# Altium PCB Power Selection.PcbDoc (part 1 of 2)
Units mm, origin at the board's own origin, x right, y up, seen from the top; angles counter-clockwise.
Board outline 152.4 x 101.6 mm, 4 copper layers (Top Layer, Ground, Signal, Bottom Layer), stack 0.777 mm thick; 134 components, 65 nets, 477 pads, 42 vias.
Unrouted connection lines stored in the file: 244.
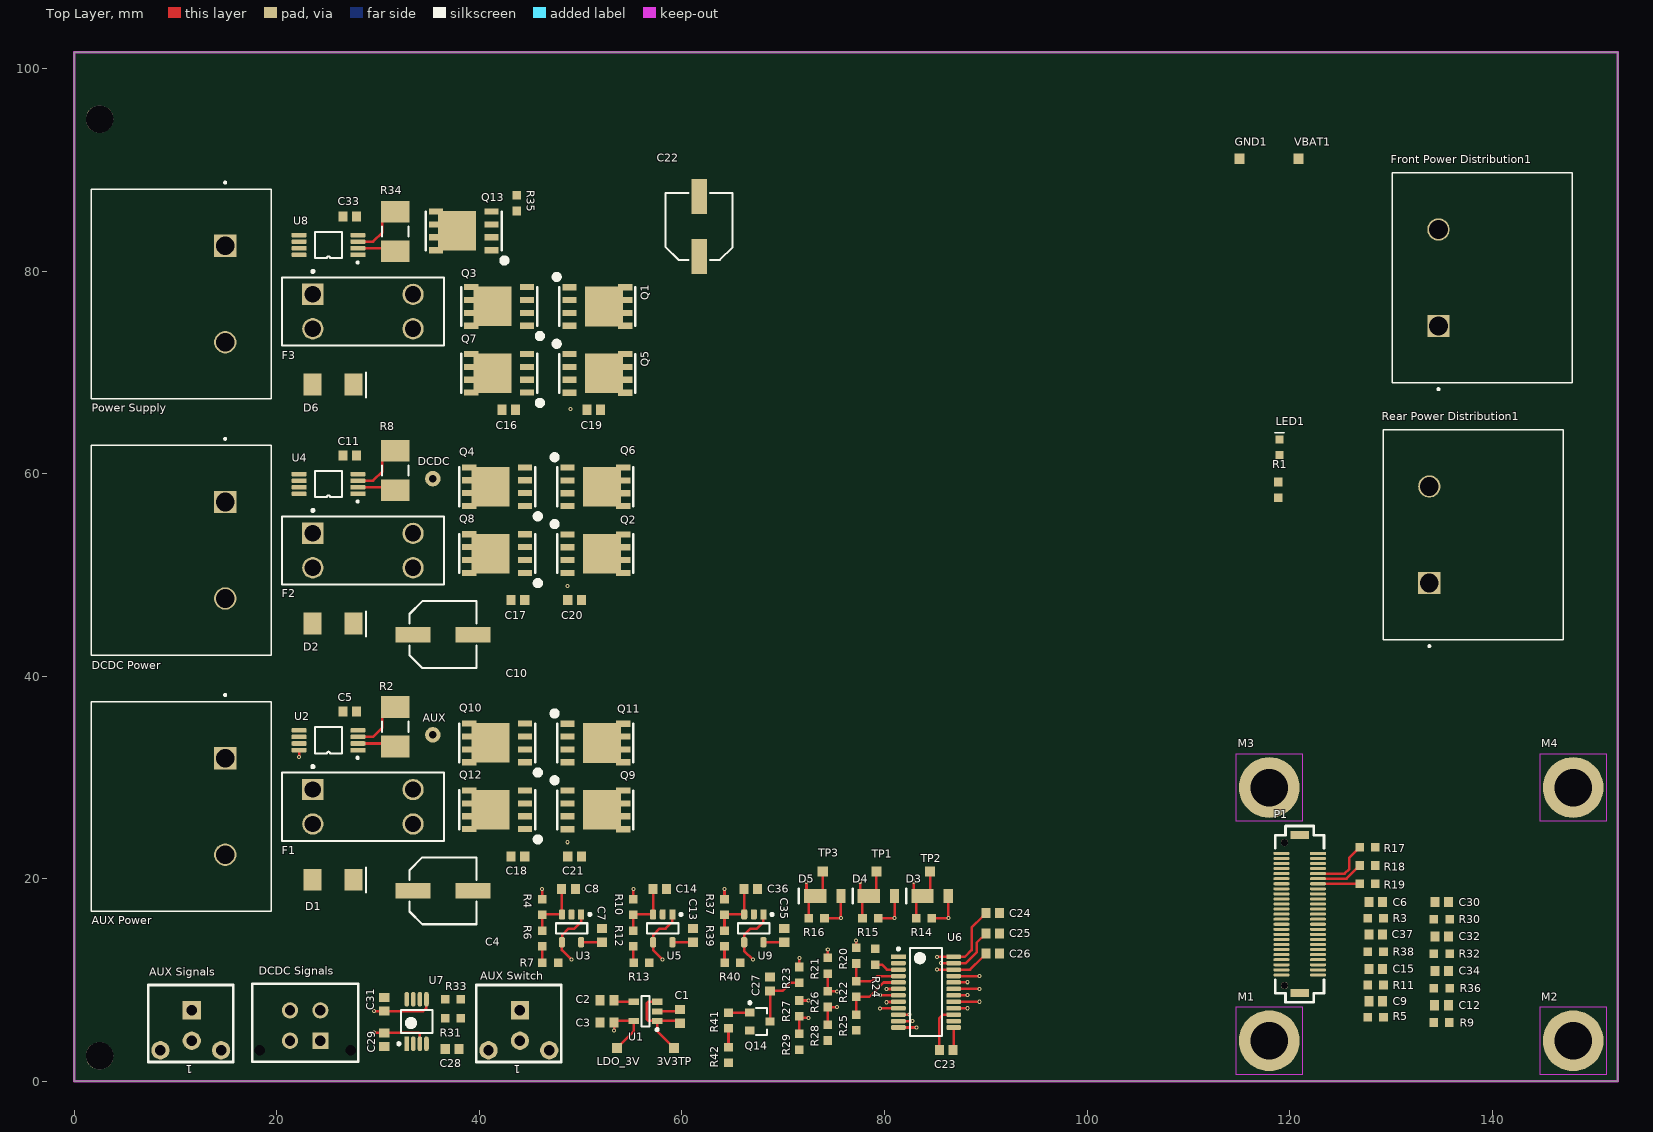
[diagram p0: Top Layer view]
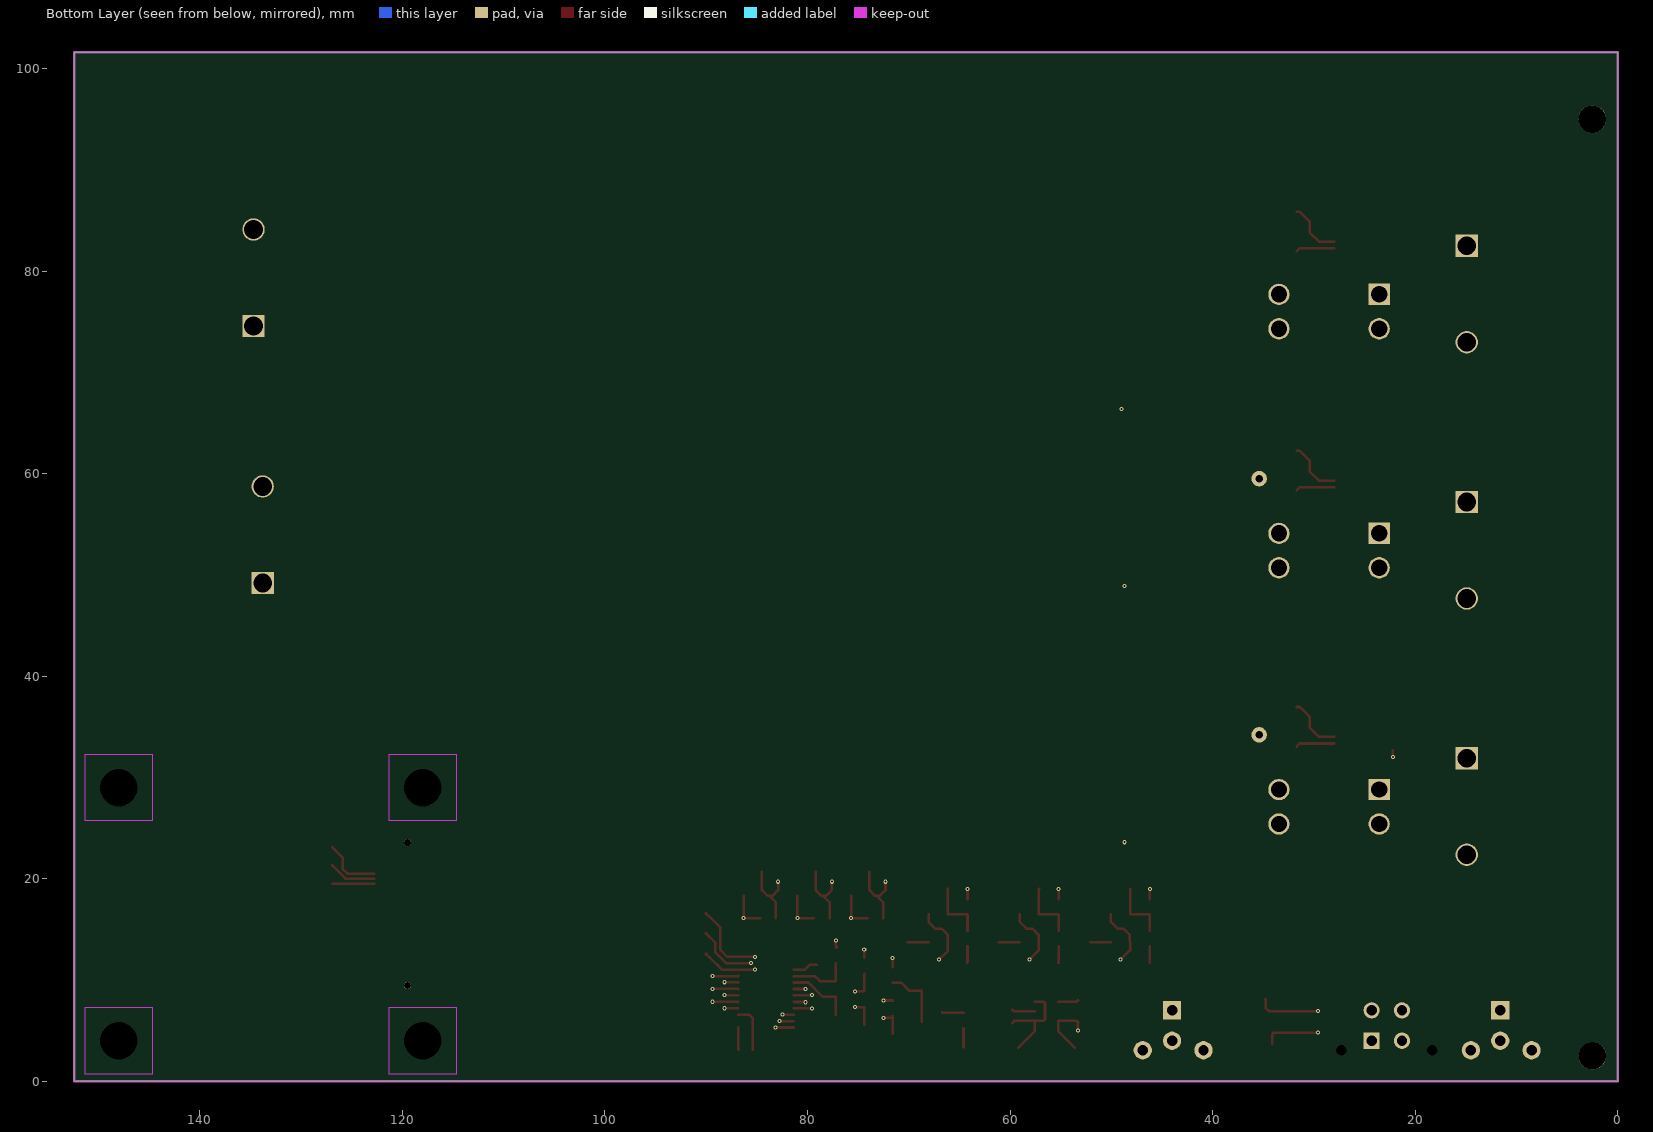
[diagram p1: Bottom Layer view, seen from below]
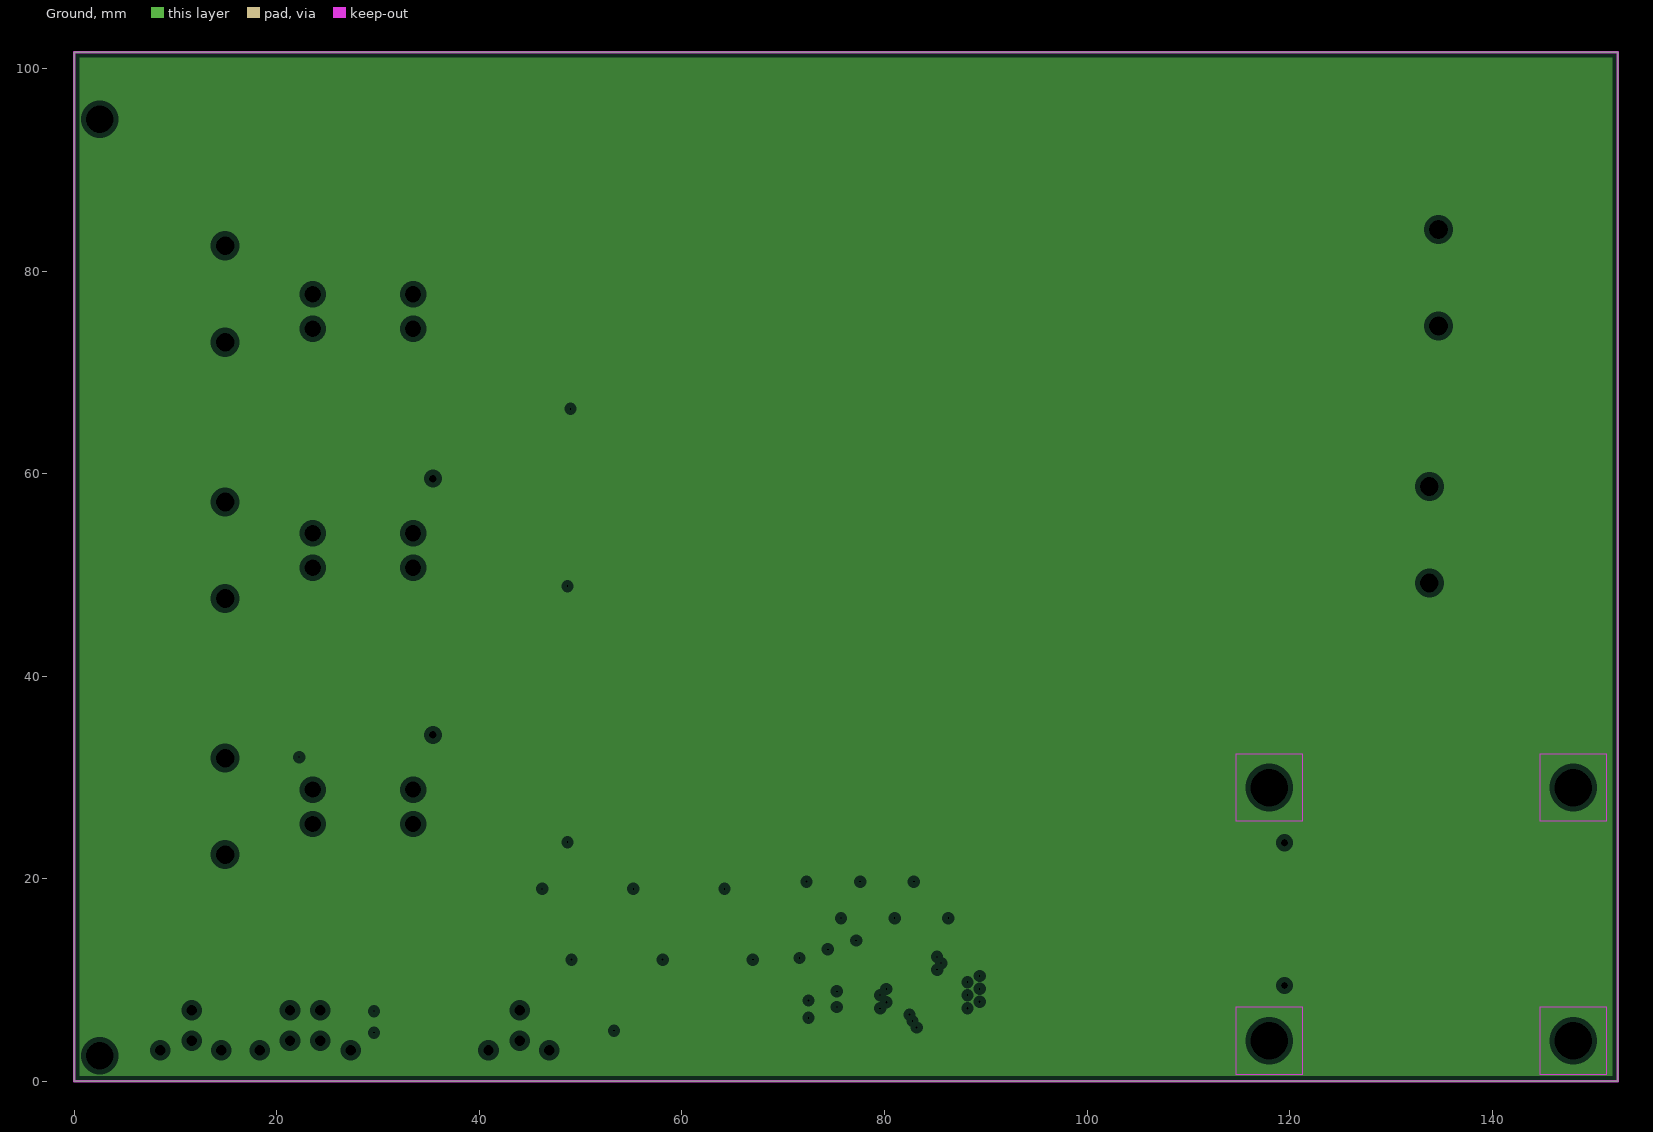
[diagram p2: Ground, clearances drawn from the general rule]
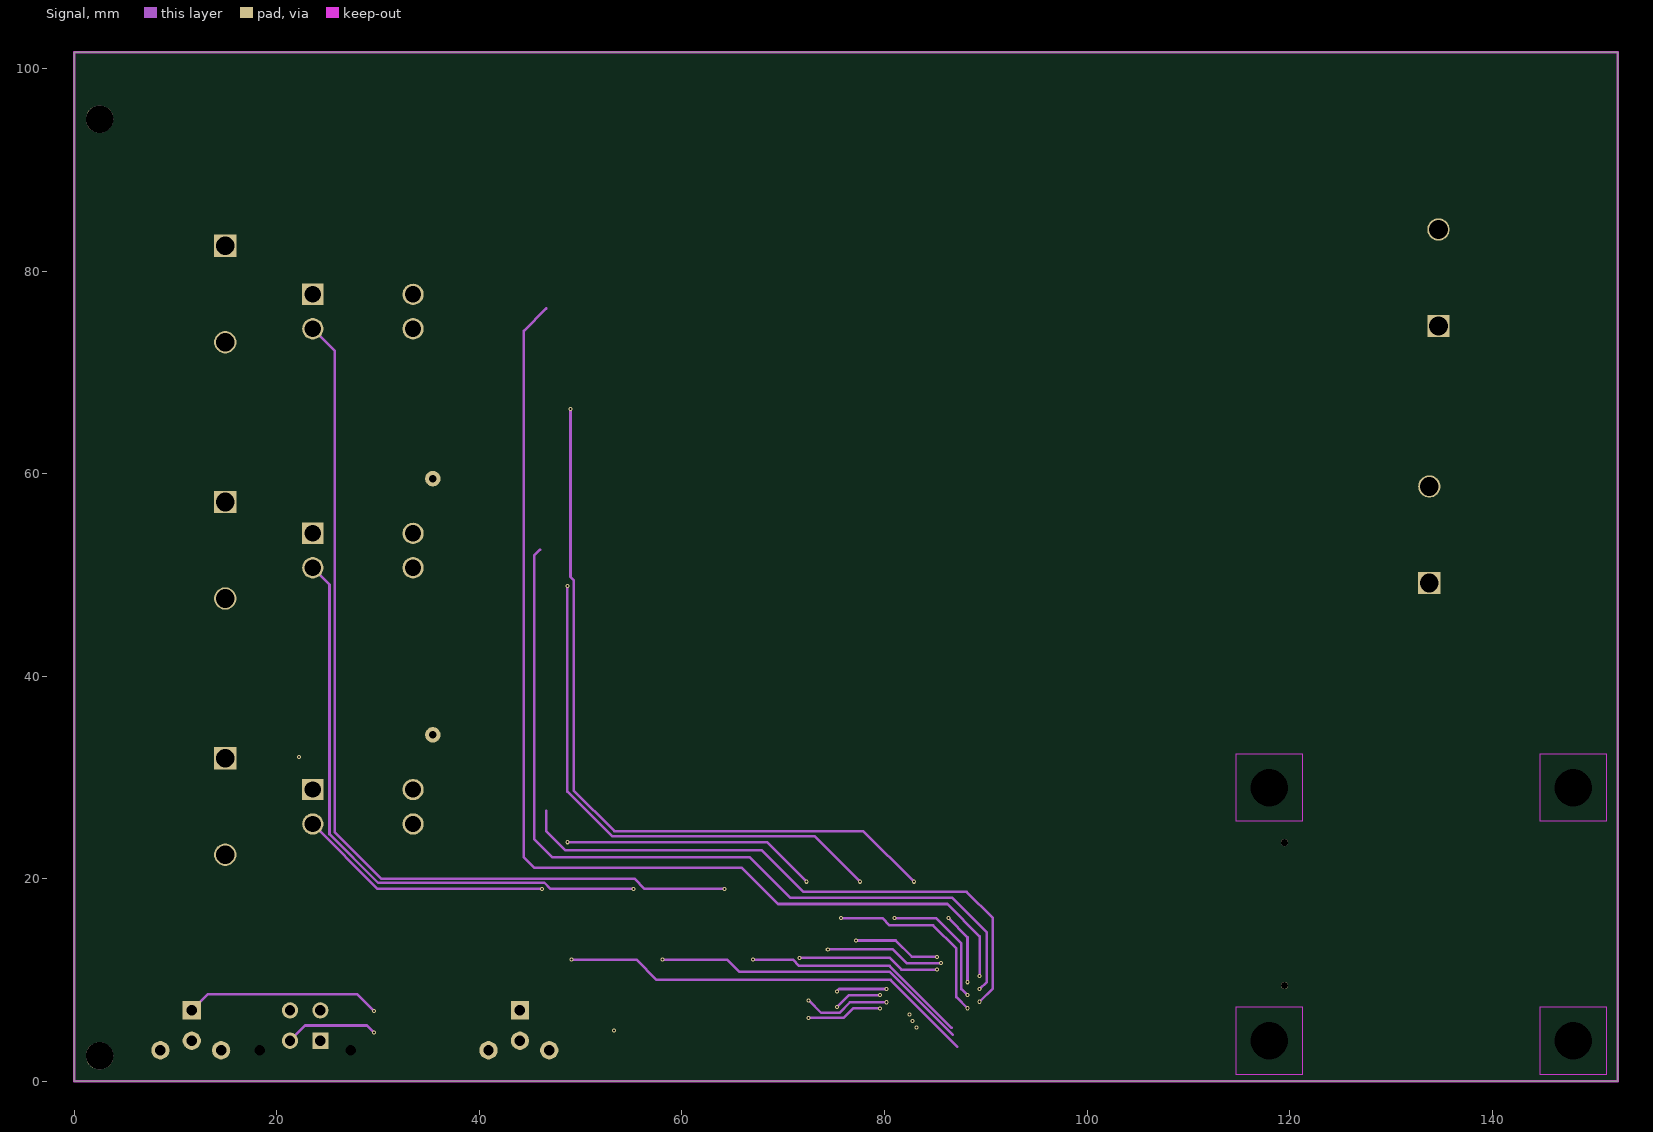
[diagram p3: Signal]

## Layer stack, top to bottom
Top Solder: solder mask 0.01, SM-001, Dk 4
Top Layer: signal copper 0.035
Dielectric 1: prepreg 0.254, PP-017, Dk 4.3
Ground: plane copper 0.036
Dielectric 3: core 0.127, Core-039, Dk 4.8
Signal: signal copper 0.036
Dielectric 5: prepreg 0.254, PP-017, Dk 4.3
Bottom Layer: signal copper 0.035
Bottom Solder: solder mask 0.01, SM-001, Dk 4

## Board outline
0,0 152.4,0 152.4,101.6 0,101.6

## Design rules (kind name [scope] priority, off if disabled: settings)
Clearance [All] p1: gap=0.254 ignorepadtopadclearanceinfootprint=FALSE except(0: Arc-Text Arc-Hole Track-Text Track-Hole SMDPad-Text SMDPad-Hole THPad-Text THPad-Hole Via-Text Via-Hole Fill-Text Fill-Hole Poly-Text Poly-Hole Region-Text Region-Hole Text-Text Text-Hole; 0.152: Arc-Arc Arc-Track Arc-SMDPad Track-Track Track-SMDPad SMDPad-SMDPad)
PlaneClearance [All] p1: clearance=0.508
PlaneConnect "Schematic Power Plane Connect Style" [InNetClass('HighCurrent')] p1: planeconnectstyle=Direct reliefexpansion=0.508 reliefentries=4 reliefconductorwidth=0.254 reliefairgap=0.254
PlaneConnect [All] p2: planeconnectstyle=Relief reliefexpansion=0.508 reliefentries=4 reliefconductorwidth=0.254 reliefairgap=0.254
PolygonConnect "Schematic Polygon Connect Style" [InNetClass('HighCurrent')] p1: connectstyle=Direct reliefconductorwidth=0.254 reliefentries=4 polygonreliefangle="45 Angle" airgapwidth=0.254
PolygonConnect [All] p2: connectstyle=Relief reliefconductorwidth=0.254 reliefentries=4 polygonreliefangle="90 Angle" airgapwidth=0.254
RoutingVias [All] p1: holewidth=0.2 width=0.4 viastyle="Through Hole" minholewidth=0.2 minwidth=0.4 maxholewidth=0.2 maxwidth=0.4
SolderMaskExpansion [All] p1: expansion=0.102 istentingtop=FALSE
Width [All] p1: maxlimit=0.254 minlimit=0.254 preferedwidth=0.254
28 further rules are at their usual default settings.

## Classes and differential pairs
net class HighCurrent: AUX_BAT_IN DCDC_FUSED DCDC_UNFUSED NetC4_1 NetC10_1 NetF3_3 "Power Supply_UNFUSED" VBAT VS_1 VS_2 VS_3
component class "Power Selection - Temperature Sense": C28 C29 C30 C31 C32 R30 R31 R32 R33 U7
component class "Power Selection - Power Supply": C33 C34 C35 C36 C37 D6 F3 "Power Supply" Q13 R34 R35 R36 R37 R38 R39 R40 U8 U9
component class "Power Selection - Power Path": C16 C17 C18 C19 C20 C21 C22 C23 C24 C25 C26 C27 D3 D4 D5 Q1 Q2 Q3 Q4 Q5 Q6 Q7 Q8 Q9 Q10 Q11 Q12 Q14 R14 R15 R16 R17 R18 R19 R20 R21 R22 R23 R24 R25 R26 R27 R28 R29 TP1 TP2 TP3 U6
component class "Power Selection - DC-DC": C10 C11 C12 C13 C14 C15 D2 DCDC "DCDC Power" "DCDC Signals" F2 R8 R9 R10 R11 R12 R13 U4 U5
component class "Power Selection - AUX": AUX "AUX Power" "AUX Signals" "AUX Switch" C4 C5 C6 C7 C8 C9 D1 F1 R2 R3 R4 R5 R6 R7 R41 R42 U2 U3
component class Controller_Board_Interface: 3V3TP C1 C2 C3 "Front Power Distribution1" GND1 LDO_3V LED1 M1 M2 M3 M4 P1 R1 "Rear Power Distribution1" U1 VBAT1

## Components (designator, comment, footprint, x,y, rotation, side; value= is the part's Value field where it differs from the comment)
3V3TP "Test Point" "Test Point"#1 59.2,1.8 r90 top
AUX "Thru Test Point" "Thru Test Point"#1 35.4,34.2 r90 top
"AUX Power" "CONN BARRIER STRIP 2CIRC 0.375\"" 6PCV-02-006 14.9,31.9 r270 top
"AUX Signals" "CONN 2POS MICRO-FIT 3mm" "CONN, 2POS MICRO-FIT" 11.5,7 r180 top
"AUX Switch" "CONN 2POS MICRO-FIT 3mm" "CONN, 2POS MICRO-FIT" 43.9,7 r180 top
C1 "CAP CER 1UF 50V 10% X7R 0603" "CAP, 0603" 59.8,6.4 r90 top
C2 "CAP CER 10nF 50V 5% X7R 0603" "CAP, 0603" 52.6,8 r180 top
C3 "CAP CER 1UF 50V 10% X7R 0603" "CAP, 0603" 52.6,5.8 r180 top
C4 "47UF" "CAP ALUM 6.3MM RADIAL SMD" 36.4,18.8 r0 top
C5 "CAP CER 0.1UF 50V 10% X7R 0603" "CAP, 0603" 27.2,36.5 r0 top
C6 "CAP CER 10nF 50V 5% X7R 0603" "CAP, 0603" 128.5,17.7 r0 top
C7 "CAP CER 0.1UF 50V 10% X7R 0603" "CAP, 0603" 52.1,14.4 r90 top
C8 "CAP CER 10nF 50V 5% X7R 0603" "CAP, 0603" 48.8,19 r0 top
C9 "CAP CER 10nF 50V 5% X7R 0603" "CAP, 0603" 128.5,7.9 r0 top
C10 "47UF" "CAP ALUM 6.3MM RADIAL SMD" 36.4,44.1 r0 top
C11 "CAP CER 0.1UF 50V 10% X7R 0603" "CAP, 0603" 27.2,61.8 r0 top
C12 "CAP CER 10nF 50V 5% X7R 0603" "CAP, 0603" 135,7.5 r0 top
C13 "CAP CER 0.1UF 50V 10% X7R 0603" "CAP, 0603" 61.1,14.4 r90 top
C14 "CAP CER 10nF 50V 5% X7R 0603" "CAP, 0603" 57.8,19 r0 top
C15 "CAP CER 10nF 50V 5% X7R 0603" "CAP, 0603" 128.5,11.1 r0 top
C16 "CAP CER 20PF 50V ±5% C0G/NP0 0603" "CAP, 0603" 42.9,66.3 r180 top value=20pF
C17 "CAP CER 20PF 50V ±5% C0G/NP0 0603" "CAP, 0603" 43.8,47.5 r180 top value=20pF
C18 "CAP CER 20PF 50V ±5% C0G/NP0 0603" "CAP, 0603" 43.8,22.2 r180 top value=20pF
C19 "CAP CER 2PF 50V C0G 0603" "CAP, 0603" 51.3,66.3 r180 top
C20 "CAP CER 2PF 50V C0G 0603" "CAP, 0603" 49.4,47.5 r0 top
C21 "CAP CER 2PF 50V C0G 0603" "CAP, 0603" 49.4,22.2 r0 top
C22 "CAP ALUM 100UF 20% 35V SMD" "CAP ALUM 6.3MM RADIAL SMD" 61.7,84.4 r90 top value=100µF
C23 "CAP CER 0.1UF 50V 10% X7R 0603" "CAP, 0603" 86.1,3.1 r0 top
C24 "CAP CER 0.1UF 50V 10% X7R 0603" "CAP, 0603" 90.7,16.6 r0 top
C25 "CAP CER 0.1UF 50V 10% X7R 0603" "CAP, 0603" 90.7,14.6 r0 top
C26 "CAP CER 0.1UF 50V 10% X7R 0603" "CAP, 0603" 90.7,12.6 r0 top
C27 "CAP CER 10nF 50V 5% X7R 0603" "CAP, 0603" 68.7,9.6 r90 top
C28 "CAP CER 0.1UF 50V 10% X7R 0603" "CAP, 0603" 37.3,3.2 r180 top
C29 "CAP CER 10nF 50V 5% X7R 0603" "CAP, 0603" 30.6,4.1 r270 top
C30 "CAP CER 10nF 50V 5% X7R 0603" "CAP, 0603" 135.025,17.7 r0 top
C31 "CAP CER 10nF 50V 5% X7R 0603" "CAP, 0603" 30.6,7.6 r90 top
C32 "CAP CER 10nF 50V 5% X7R 0603" "CAP, 0603" 135.025,14.3 r0 top
C33 "CAP CER 0.1UF 50V 10% X7R 0603" "CAP, 0603" 27.2,85.4 r0 top
C34 "CAP CER 10nF 50V 5% X7R 0603" "CAP, 0603" 135.025,10.9 r0 top
C35 "CAP CER 0.1UF 50V 10% X7R 0603" "CAP, 0603" 70.1,14.4 r90 top
C36 "CAP CER 10nF 50V 5% X7R 0603" "CAP, 0603" 66.8,19 r0 top
C37 "CAP CER 10nF 50V 5% X7R 0603" "CAP, 0603" 128.5,14.5 r0 top
D1 "DIODE TVS 15VWM 24.4VC DO-214AA (SMB)" "DO-214AA Diode" 23.5,19.9 r0 top
D2 "DIODE TVS 15VWM 24.4VC DO-214AA (SMB)" "DO-214AA Diode" 23.5,45.2 r0 top
D3 "DIODE SCHOTTKY 30V 1A POWERDI123" "DIODE SCHOTTKY 30V 1A POWERDI123" 86.3,18.3 r180 top
D4 "DIODE SCHOTTKY 30V 1A POWERDI123" "DIODE SCHOTTKY 30V 1A POWERDI123" 81,18.3 r180 top
D5 "DIODE SCHOTTKY 30V 1A POWERDI123" "DIODE SCHOTTKY 30V 1A POWERDI123" 75.7,18.3 r180 top
D6 "DIODE TVS 15VWM 24.4VC DO-214AA (SMB)" "DO-214AA Diode" 23.5,68.8 r0 top
DCDC "Thru Test Point" "Thru Test Point"#2 36.8,59.5 r90 top
"DCDC Power" "CONN BARRIER STRIP 2CIRC 0.375\"" 6PCV-02-006 14.9,57.2 r270 top
"DCDC Signals" "CONN 4POS MICRO-FIT 3mm" "CONN 4POS MICROFIT (2x2)" 21.3,7 r180 top
F1 "3568" KSTN-3568_V 28.5,27.1 r0 top
F2 "3568" KSTN-3568_V 28.5,52.4 r0 top
F3 "3568" KSTN-3568_V 28.5,76 r0 top
"Front Power Distribution1" "CONN BARRIER STRIP 2CIRC 0.375\"" 6PCV-02-006 134.7,74.57 r90 top
GND1 "Test Point" "Test Point"#2 115.054,91.087 r90 top
LDO_3V "Test Point" "Test Point"#3 53.6,3.1 r90 top
LED1 "LED GREEN CLEAR 2V 0603" LED_0603 119,61.9 r90 top
M1 "STANDOFF RND M2.5X0.45 STEEL 5MM" "M2.5 Standoff" 118,4 r0 top locked
M2 "STANDOFF RND M2.5X0.45 STEEL 5MM" "M2.5 Standoff" 148,4 r0 top locked
M3 "STANDOFF RND M2.5X0.45 STEEL 5MM" "M2.5 Standoff" 118,29 r0 top locked
M4 "STANDOFF RND M2.5X0.45 STEEL 5MM" "M2.5 Standoff" 148,29 r0 top locked
P1 "CONN 50POS Bergstak Plug 0.02\"" "CONN, Bergstak 50 Pos Plug" 121,16.5 r0 top locked
"Power Supply" "CONN BARRIER STRIP 2CIRC 0.375\"" 6PCV-02-006 14.9,82.5 r270 top
Q1 "MOSFET P-CH PWR56 40V 4.9 MOHM" "PMOS PWR56 40V 4.9 MOHM" 48.9,78.4 r0 top
Q2 "MOSFET P-CH PWR56 40V 4.9 MOHM" "PMOS PWR56 40V 4.9 MOHM" 48.7,54 r0 top
Q3 "MOSFET P-CH PWR56 40V 4.9 MOHM" "PMOS PWR56 40V 4.9 MOHM" 44.7,74.6 r180 top
Q4 "MOSFET P-CH PWR56 40V 4.9 MOHM" "PMOS PWR56 40V 4.9 MOHM" 44.5,56.8 r180 top
Q5 "MOSFET P-CH PWR56 40V 4.9 MOHM" "PMOS PWR56 40V 4.9 MOHM" 48.9,71.8 r0 top
Q6 "MOSFET P-CH PWR56 40V 4.9 MOHM" "PMOS PWR56 40V 4.9 MOHM" 48.7,60.6 r0 top
Q7 "MOSFET P-CH PWR56 40V 4.9 MOHM" "PMOS PWR56 40V 4.9 MOHM" 44.7,68 r180 top
Q8 "MOSFET P-CH PWR56 40V 4.9 MOHM" "PMOS PWR56 40V 4.9 MOHM" 44.5,50.2 r180 top
Q9 "MOSFET P-CH PWR56 40V 4.9 MOHM" "PMOS PWR56 40V 4.9 MOHM" 48.7,28.7 r0 top
Q10 "MOSFET P-CH PWR56 40V 4.9 MOHM" "PMOS PWR56 40V 4.9 MOHM" 44.5,31.5 r180 top
Q11 "MOSFET P-CH PWR56 40V 4.9 MOHM" "PMOS PWR56 40V 4.9 MOHM" 48.7,35.3 r0 top
Q12 "MOSFET P-CH PWR56 40V 4.9 MOHM" "PMOS PWR56 40V 4.9 MOHM" 44.5,24.9 r180 top
Q13 "MOSFET P-CH PWR56 40V 4.9 MOHM" "PMOS PWR56 40V 4.9 MOHM" 41.2,82.06 r180 top
Q14 "MOSFET N-CH 30V 6.2A 0.9W SOT-23" "MOSFET N-CH 30V 6.2A 0.9W SOT-23" 67.7,5.9 r0 top
R1 "RES 4.7K OHM 1% 1/10W 0603" "RES, 0603" 118.9,58.4 r90 top
R2 "RES 0.003 OHM 1% 1.5W 2010" "RES 2010" 31.7,35 r90 top
R3 "RES 100 OHM 1% 1/10W 0603" "RES, 0603" 128.5,16.1 r180 top
R4 "RES 470K OHM 1% 1/4W 0603" "RES, 0603" 46.2,17.2 r270 top
R5 "RES 100 OHM 1% 1/10W 0603" "RES, 0603" 128.5,6.3 r180 top
R6 "RES 100K OHM 5% 1/8W 0603" "RES, 0603" 46.2,14.1 r270 top
R7 "RES 10K OHM 1% 1/10W 0603" "RES, 0603" 47,11.7 r0 top
R8 "RES 4m OHM 1% 2W 2010" "RES 2010" 31.7,60.3 r90 top
R9 "RES 100 OHM 1% 1/10W 0603" "RES, 0603" 135,5.8 r180 top
R10 "RES 470K OHM 1% 1/4W 0603" "RES, 0603" 55.2,17.2 r270 top
R11 "RES 100 OHM 1% 1/10W 0603" "RES, 0603" 128.5,9.5 r180 top
R12 "RES 100K OHM 5% 1/8W 0603" "RES, 0603" 55.2,14.1 r270 top
R13 "RES 10K OHM 1% 1/10W 0603" "RES, 0603" 56,11.7 r0 top
R14 "2.21K" "RES, 0603" 83.9,16.1 r0 top
R15 "2.21K" "RES, 0603" 78.6,16.1 r0 top
R16 "2.21K" "RES, 0603" 73.3,16.1 r0 top
R17 "RES 10K OHM 1% 1/10W 0603" "RES, 0603" 127.7,23.1 r180 top
R18 "RES 10K OHM 1% 1/10W 0603" "RES, 0603" 127.7,21.3 r180 top
R19 "RES 10K OHM 1% 1/10W 0603" "RES, 0603" 127.7,19.5 r180 top
R20 "RES 1M OHM 1% 1/10W 0603" "RES, 0603" 77.2,12.402 r270 top
R21 "RES 1M OHM 1% 1/10W 0603" "RES, 0603" 74.4,11.4 r270 top
R22 "RES 19.6K OHM 1% 1/10W 0603" "RES, 0603" 77.2,9.102 r270 top
R23 "RES 1M OHM 1% 1/10W 0603" "RES, 0603" 71.6,10.5 r270 top
R24 "RES 255K OHM 1% 1/10W 0603" "RES, 0603" 79.1,12.292 r90 top
R25 "RES SMD 75K OHM 0.1% 1/10W 0603" "RES, 0603" 77.2,5.802 r90 top value=75KR
R26 "RES 29.4K OHM 1% 1/10W 0603" "RES, 0603" 74.4,8.1 r270 top
R27 "RES SMD 44.2K OHM 1% 1/10W 0603" "RES, 0603" 71.6,7.2 r270 top
R28 "RES 76.8K OHM 1% 1/10W 0603" "RES, 0603" 74.4,4.8 r270 top
R29 "RES SMD 75K OHM 0.1% 1/10W 0603" "RES, 0603" 71.6,3.9 r270 top value=75KR
R30 "RES 10K OHM 1% 1/10W 0603" "RES, 0603" 135.025,16 r180 top
R31 "RES 10K OHM 1% 1/10W 0603" "RES, 0603" 37.4,6.2 r0 top
R32 "RES 10K OHM 1% 1/10W 0603" "RES, 0603" 135.025,12.6 r180 top
R33 "RES 10K OHM 1% 1/10W 0603" "RES, 0603" 37.4,8.1 r0 top
R34 "RES 4m OHM 1% 2W 2010" "RES 2010" 31.7,83.9 r90 top
R35 "RES 10K OHM 1% 1/10W 0603" "RES, 0603" 43.7,86.7 r90 top
R36 "RES 100 OHM 1% 1/10W 0603" "RES, 0603" 135.025,9.2 r180 top
R37 "RES 470K OHM 1% 1/4W 0603" "RES, 0603" 64.2,17.2 r270 top
R38 "RES 100 OHM 1% 1/10W 0603" "RES, 0603" 128.5,12.8 r180 top
R39 "RES 100K OHM 5% 1/8W 0603" "RES, 0603" 64.2,14.1 r270 top
R40 "RES 10K OHM 1% 1/10W 0603" "RES, 0603" 65,11.7 r0 top
R41 "RES SMD 1K OHM 0.1% 1/10W 0603" "RES, 0603" 64.6,6 r90 top value=10k
R42 "RES 1M OHM 1% 1/10W 0603" "RES, 0603" 64.6,2.6 r270 top
"Rear Power Distribution1" "CONN BARRIER STRIP 2CIRC 0.375\"" 6PCV-02-006 133.8,49.2 r90 top
TP1 "Test Point" "Test Point"#4 79.2,20.8 r90 top
TP2 "Test Point" "Test Point"#2 84.5,20.7 r90 top
TP3 "Test Point" "Test Point"#5 73.9,20.9 r90 top
U1 "IC REG LINEAR 3V 200MA SOT23-5" SOT95P280X145-5N 56.4,6.902 r180 top
U2 "50V/V" "IC CURRENT AMPLIFIER INA240 TSSOP-8" 28,32.7 r180 top
U3 "IC OP AMP GEN PURPOSE RR 10MHZ SOT-23-5" "IC OP AMP GP RR 10MHZ SOT-23-5" 49.1,15.1 r270 top
U4 "100V/V" "IC CURRENT AMPLIFIER INA240 TSSOP-8" 28,58 r180 top
U5 "IC OP AMP GEN PURPOSE RR 10MHZ SOT-23-5" "IC OP AMP GP RR 10MHZ SOT-23-5" 58.1,15.1 r270 top
U6 "IC OR CONTROLLER SOURCE SELECT 24SSOP" "IC OR CTRLR SRC SELECT 24SSOP" 84.1,8.8 r0 top
U7 "IC OP AMP DUAL GP RR 10MHZ 8-VSSOP" "IC DUAL OPAMP OPA2197 8-VSSOP" 33.8,5.9 r90 top
U8 "100V/V" "IC CURRENT AMPLIFIER INA240 TSSOP-8" 28,81.6 r180 top
U9 "IC OP AMP GEN PURPOSE RR 10MHZ SOT-23-5" "IC OP AMP GP RR 10MHZ SOT-23-5" 67.1,15.1 r270 top
VBAT1 "Test Point" "Test Point"#2 120.896,91.087 r90 top

## Footprints (in the part's own frame and the unit in brackets; to place one, negate y for a bottom-side part, rotate by r counter-clockwise, add the part's x,y. Pads: shape width x height; smd on the part's side, far side on the other; paste and mask are expansions set on the pad)
6PCV-02-006 [mm]
  rect 2.204x2.204 hole 1.854: 1(0,0)
  round 2.204 hole 1.854: 2(9.53,0)
  silkscreen extent -6.34,-13.21 15.12,4.57
"CAP ALUM 6.3MM RADIAL SMD" [mm] "Aluminum Electrolytic Capacitor, Body 6.50x6.50x5.50mm, IPC Low Density"
  rect 3.45x1.55 smd: 1(-2.95,0) 2(2.95,0)
  silkscreen extent -3.3,-3.3 3.3,3.3, body extent -3.9,-3.3 3.9,3.3, height 5.5
"CAP, 0603" [mm] "Chip Capacitor, 2-Leads, Body 1.60x0.81mm, IPC Medium Density"
  rect 0.9x1 smd mask+0.076: 1(-0.675,0) 2(0.675,0)
  body extent -0.87,-0.48 0.87,0.48, height 0.9
"CONN 4POS MICROFIT (2x2)" [mm]
  round 1.6 hole 1.02: 1(0,0) 2(-3,0) 3(0,3)
  rect 1.6x1.6 hole 1.02: 4(-3,3)
  round 0 hole 1.02: ""(-6,3.94) ""(3,3.94)
  silkscreen extent -6.75,-2.63 3.75,5.06, body extent -6.57,-2.47 3.57,6.29, height 9.91
"CONN, 2POS MICRO-FIT" [mm]
  round 1.8 hole 1.02: 0(-3,3.94) 0(3,3.94) 2(-0.1,3)
  rect 1.8x1.8 hole 1.02: 1(-0.1,0)
  silkscreen extent -4.2,-2.5 4.2,5.1, body extent -3.67,-2.47 3.48,6.3, height 9.95
"CONN, Bergstak 50 Pos Plug" [mm] "Bergstak 50 Position Plug"
  rect 1.6x0.3 smd: 1(1.8,6)
  oval 1.6x0.3 smd: 2(1.8,5.5) 3(1.8,5) 4(1.8,4.5) 5(1.8,4) 6(1.8,3.5) 7(1.8,3) 8(1.8,2.5) 9(1.8,2) 10(1.8,1.5) 11(1.8,1) 12(1.8,0.5) 13(1.8,0) 14(1.8,-0.5) 15(1.8,-1) 16(1.8,-1.5) 17(1.8,-2) 18(1.8,-2.5) 19(1.8,-3) 20(1.8,-3.5) 21(1.8,-4) 22(1.8,-4.5) 23(1.8,-5) 24(1.8,-5.5) 25(1.8,-6) 26(-1.8,-6) 27(-1.8,-5.5) 28(-1.8,-5) 29(-1.8,-4.5) 30(-1.8,-4) 31(-1.8,-3.5) 32(-1.8,-3) 33(-1.8,-2.5) 34(-1.8,-2) 35(-1.8,-1.5) 36(-1.8,-1) 37(-1.8,-0.5) 38(-1.8,0) 39(-1.8,0.5) 40(-1.8,1) 41(-1.8,1.5) 42(-1.8,2) 43(-1.8,2.5) 44(-1.8,3) 45(-1.8,3.5) 46(-1.8,4) 47(-1.8,4.5) 48(-1.8,5) 49(-1.8,5.5) 50(-1.8,6)
  round 0.7 hole 0.7: ""(-1.5,-7.05) ""(-1.5,7.05)
  rect 1.8x0.8 smd: ""(0,-7.8) ""(0,7.8)
  silkscreen extent -2.4,-8.7 2.4,8.7, body extent -2.3,-7.75 2.3,7.75, height 4.2
"DIODE SCHOTTKY 30V 1A POWERDI123" [mm] "Diodes Incorporated DFLS130L-7"
  rect 0.9x1.4 smd: 1(0,0)
  rect 2.2x1.4 smd: 2(2.55,0)
  silkscreen extent 4.15,-0.7 4.15,0.7, body extent -0.27,-0.88 3.42,0.9, height 0.98
"DO-214AA Diode" [mil] "Zener Diode 16V 5W SMBJ5353B-TP"
  rect 70x85 smd: 1(0,0) 2(160,0)
  silkscreen extent 209,-50 209,47, body extent -21,-60 187,55, height 95
"IC CURRENT AMPLIFIER INA240 TSSOP-8" [mm]
  rect 1.5x0.45 smd: 1(0,0)
  rrect50% 1.5x0.45 smd: 2(0,-0.65) 3(0,-1.3) 4(0,-1.95) 5(5.8,-1.95) 6(5.8,-1.3) 7(5.8,-0.65) 8(5.8,0)
  silkscreen extent -0.06,-2.28 4.22,0.84, body extent -0.28,-2.52 6.22,0.58, height 1.2
"IC DUAL OPAMP OPA2197 8-VSSOP" [mm] "TSOP, 8-Leads, Body 3.00x3.00mm, Pitch 0.65mm, IPC Medium Density"
  rect 1.45x0.45 smd: 1(-2.2,0.975)
  oval 1.45x0.45 smd: 2(-2.2,0.325) 3(-2.2,-0.325) 4(-2.2,-0.975) 5(2.2,-0.975) 6(2.2,-0.325) 7(2.2,0.325) 8(2.2,0.975)
  silkscreen extent -2.32,-1.55 1.15,1.87, body extent -2.45,-1.55 2.45,1.55, height 1.1
"IC OP AMP GP RR 10MHZ SOT-23-5" [mm] "SOT23, 5-Leads, Body 2.90x2.80mm, Pitch 0.95mm, IPC Medium Density"
  rect 1x0.6 smd: 1(-1.375,0.95)
  rrect50% 1x0.6 smd: 2(-1.375,0) 3(-1.375,-0.95) 4(1.375,-0.95) 5(1.375,0.95)
  silkscreen extent -1.5,-1.55 0.5,1.93, body extent -1.5,-1.53 1.5,1.53, height 1.45
"IC OR CTRLR SRC SELECT 24SSOP" [mm] "LTC4417"
  rect 1.45x0.45 smd: 1(-2.725,3.492)
  rrect50% 1.45x0.45 smd: 2(-2.725,2.857) 3(-2.725,2.222) 4(-2.725,1.587) 5(-2.725,0.953) 6(-2.725,0.318) 7(-2.725,-0.318) 8(-2.725,-0.953) 9(-2.725,-1.587) 10(-2.725,-2.222) 11(-2.725,-2.857) 12(-2.725,-3.492) 13(2.725,-3.492) 14(2.725,-2.857) 15(2.725,-2.222) 16(2.725,-1.587) 17(2.725,-0.953) 18(2.725,-0.318) 19(2.725,0.318) 20(2.725,0.953) 21(2.725,1.587) 22(2.725,2.222) 23(2.725,2.857) 24(2.725,3.492)
  silkscreen extent -2.85,-4.35 1.6,4.39, body extent -3,-4.35 3,4.35, height 1.75
KSTN-3568_V [mm] "THD, 4-Leads, Body 16x6.73mm, Pitch 9.9mm"
  rect 2.1x2.1 hole 1.6: 1(-4.95,1.7)
  round 2.1 hole 1.6: 2(-4.95,-1.7) 3(4.95,1.7) 4(4.95,-1.7)
  silkscreen extent -8,-3.36 8,4.09, body extent -8,-3.37 8,3.37, height 7.44
LED_0603 [mm]
  rect 0.8x0.8 smd: 1(-0.05,0.01) 2(1.45,0.01)
  silkscreen extent 2.13,-0.46 2.13,0.45, body extent -0.09,-0.39 1.51,0.41, height 0.8
"M2.5 Standoff" [mm]
  round 6 smd: ""(0,0)
  round 0 hole 3.7: ""(0,0)
  Keep-Out Layer region: -3.3,-3.3 3.3,-3.3 3.3,3.3 -3.3,3.3
"MOSFET N-CH 30V 6.2A 0.9W SOT-23" [mm] "SOT23, 3-Leads, Body 2.90x2.40mm, Pitch 0.90mm, IPC Medium Density"
  rect 0.9x0.8 smd: 1(-1,0.9) 2(-1,-0.9) 3(1,0)
  silkscreen extent -1.12,-1.35 0.7,1.97, body extent -1.25,-1.5 1.25,1.5, height 1.1
"PMOS PWR56 40V 4.9 MOHM" [mm] "Mosfet Array 2 P-Channel (Dual) 30V 60A 46W Surface Mount PowerPAK?SO-8 Dual"
  rect 1.42x0.61 smd: 1(0,0) 2(0,-1.27) 3(0,-2.54) 4(0,-3.81) 5(5.49,-3.81) 6(5.49,-2.54) 7(5.49,-1.27) 8(5.49,0)
  rect 3.75x3.91 smd: 8(3.405,-1.905)
  silkscreen extent -1.52,-3.81 6.51,1.27, body extent -0.69,-4.32 6.17,0.51, height 1.2
"RES 2010" [mm] "Chip Resistor, 2-Leads, Body 5.08x2.54mm, IPC Medium Density"
  rect 2.15x2.8 smd: 1(-1.95,0) 2(1.95,0)
  silkscreen extent -0.5,-1.3 0.5,1.3, body extent -2.67,-1.4 2.67,1.4, height 1.04
"RES, 0603" [mm] "Chip Resistor, 2-Leads, Body 1.60x0.80mm, IPC Medium Density"
  rect 0.85x0.85 smd: 1(-0.775,0) 2(0.775,0)
  body extent -0.8,-0.4 0.8,0.4, height 0.55
SOT95P280X145-5N [mm] "SOT23, 5-Leads, Body 2.95x2.80mm, Pitch 0.95mm, IPC Medium Density"
  rect 1.05x0.6 smd: 1(-1.15,0.95) 2(-1.15,0) 3(-1.15,-0.95) 4(1.15,-0.95) 5(1.15,0.95)
  silkscreen extent -1.28,-1.5 0.4,1.92, body extent -1.4,-1.48 1.4,1.48, height 1.45
"Test Point"#1 [mm]
  rect 1x1 smd paste-2: TP(1.5,0)
"Test Point"#2 [mm]
  rect 1x1 smd paste-2: TP(0,0)
"Test Point"#3 [mm]
  rect 1x1 smd paste-2: TP(0.2,0)
"Test Point"#4 [mm]
  rect 1x1 smd paste-2: TP(-0.1,0)
"Test Point"#5 [mm]
  rect 1x1 smd paste-2: TP(-0.2,0)
"Thru Test Point"#1 [mil]
  round 60 hole 30: TH_TP(0,0)
"Thru Test Point"#2 [mil]
  round 60 hole 30: TH_TP(0,55.12)

## Part data
"AUX Power" "DCDC Power" "Front Power Distribution1" "Power Supply" "Rear Power Distribution1": "2 Circuit 0.375\" (9.53mm) Barrier Block Connector, Screws", Supplier Part Number 1=A98481-ND, ComponentLink1Description=https://www.te.com/commerce/DocumentDelivery/DDEController?Action=srchrtrv&DocNm=3-1437652-9&DocType=Customer+Drawing&DocLang=English, ComponentLink1URL=https://www.te.com/commerce/DocumentDelivery/DDEController?Action=srchrtrv&DocNm=3-1437652-9&DocType=Customer+Drawing&DocLang=English, Supplier 1=Digi-Key
"AUX Signals" "AUX Switch": "Connector Header Through Hole 2 position", Contact Resistance=10mR, Current Rating=5A, Housing Colour=Black, Manufacturer=Molex, Manufacturer Part Number=43045-0227, Max Operating Temperature=105°C, Max Voltage Rating (DC)=250.25kV, Min Operating Temperature=-40°C, Package Quantity=3168, Supplier Part Number 1=WM10657-ND, Voltage Rating=600V, ComponentLink1Description=http://www.onlinecomponents.com/productFiles/mf-MOL/307170430450227_pcb_headers.pdf, ComponentLink1URL=http://www.onlinecomponents.com/productFiles/mf-MOL/307170430450227_pcb_headers.pdf, ComponentLink2Description=http://www.mouser.com/ds/2/276/0430450227_PCB_HEADERS-142611.pdf, ComponentLink2URL=http://www.mouser.com/ds/2/276/0430450227_PCB_HEADERS-142611.pdf, ComponentLink3Description=http://uk.rs-online.com/webdocs/13c3/0900766b813c3a46.pdf, ComponentLink3URL=http://uk.rs-online.com/webdocs/13c3/0900766b813c3a46.pdf, ComponentLink4Description=http://www.molex.com/webdocs/datasheets/pdf/en-us/0430450227_PCB_HEADERS.pdf, ComponentLink4URL=http://www.molex.com/webdocs/datasheets/pdf/en-us/0430450227_PCB_HEADERS.pdf, Contact Material=Brass, Contact Plating=Tin, Depth=8.77mm, Gender=Male, Glow Wire Compliant=Compliant, Halogen Free="Low Halogen", Housing Material=Thermoplastic, Length=7.15mm, Mount="Through Hole", Number of Circuits=2, Number of Contacts=2, Number of Ports=1, Number of Positions=2, Number of Rows=2, Number of Terminals=2, Orientation=Vertical, Packaging=Tray, Pitch=3mm, Pricing 1="1=0.84, 10=0.74, 25=0.6968, 50=0.6676, 100=0.6387, 250=0.5806, 500=0.52254, 1000=0.46448, 2500=0.42094 (USD)", Radiation Hardening=No, Row Spacing=3mm, Stock 1=3657, Supplier 1=Digi-Key, Termination=Solder
C1 C3: "1µF ±10% 50V Ceramic Capacitor X7R 0603 (1608 Metric)", Capacitance=1µF, Manufacturer 1="Taiyo Yuden", Manufacturer Part Number 1=UMK107AB7105KA-T, Operating Temperature="-55°C ~ 125°C", Package / Case="0603 (1608 Metric)", Ratings=-, Supplier Part Number 1=587-3247-1-ND, Temperature Coefficient=X7R, Tolerance=±10%, Voltage=50V, ComponentLink1Description=http://www.yuden.co.jp/productdata/catalog/en/mlcc_all_e.pdf, ComponentLink1URL=http://www.yuden.co.jp/productdata/catalog/en/mlcc_all_e.pdf, Height - Seated (Max)=-, Lead Spacing=-, Lead Style=-, Mounting Type="Surface Mount, MLCC", Packaging="Cut Tape (CT)", Part Status=Active, Size / Dimension="0.063\" L x 0.031\" W (1.60mm x 0.80mm)", Supplier 1=Digi-Key, Thickness (Max)="0.037\" (0.95mm)"
C2 C6 C8 C9 C12 C14 C15 C27 C29 C30 C31 C32 C34 C36 C37: "10000pF ±5% 50V Ceramic Capacitor U2J 0603 (1608 Metric)", Capacitance=10000pF, Manufacturer 1=KEMET, Manufacturer Part Number 1=C0603C103J5JAC7867, Operating Temperature="-55°C ~ 125°C", Package / Case="0603 (1608 Metric)", Ratings=-, Supplier Part Number 1=399-13384-1-ND, Temperature Coefficient=U2J, Tolerance=±5%, Voltage=50V, ComponentLink1Description=http://www.kemet.com/docfinder?Partnumber=C0603C103J5JAC7867, ComponentLink1URL=http://www.kemet.com/docfinder?Partnumber=C0603C103J5JAC7867, Failure Rate=-, Height - Seated (Max)=-, Lead Spacing=-, Lead Style=-, Mounting Type="Surface Mount, MLCC", Packaging="Cut Tape (CT)", Part Status=Active, Size / Dimension="0.063\" L x 0.032\" W (1.60mm x 0.80mm)", Supplier 1=Digi-Key, Thickness (Max)="0.034\" (0.87mm)"
C4 C10: library part "CAP ALUM 47UF 20% 35V SMD", "47µF 35V Aluminum Electrolytic Capacitors Radial, Can - SMD 1000 Hrs @ 85°C", Capacitance=47uF, Case/Package=Radial, Manufacturer=Panasonic, Manufacturer Part Number=EEE-1VA470WP, Max Operating Temperature=85°C, Min Operating Temperature=-40°C, Package Quantity=1, Ripple Current=70mA, Supplier Part Number 1=PCE3961CT-ND, Tolerance=20%, Voltage Rating=35V, ComponentLink1Description=https://datasheet.ciiva.com/2983/aba0000ce2-2983926.pdf, ComponentLink1URL=https://datasheet.ciiva.com/2983/aba0000ce2-2983926.pdf, ComponentLink2Description=https://datasheet.ciiva.com/2983/aba0000ce2-2983927.pdf, ComponentLink2URL=https://datasheet.ciiva.com/2983/aba0000ce2-2983927.pdf, ComponentLink3Description=https://datasheet.ciiva.com/14598/70255710-14598937.pdf, ComponentLink3URL=https://datasheet.ciiva.com/14598/70255710-14598937.pdf, ComponentLink4Description=https://datasheet.ciiva.com/15165/getdatasheetpartid-86239-15165868.pdf, ComponentLink4URL=https://datasheet.ciiva.com/15165/getdatasheetpartid-86239-15165868.pdf, ComponentLink5Description=https://datasheet.ciiva.com/16507/aba0000ce2-16507965.pdf, ComponentLink5URL=https://datasheet.ciiva.com/16507/aba0000ce2-16507965.pdf, ComponentLink6Description=https://datasheet.ciiva.com/30206/11aba0000ce2-30206253.pdf, ComponentLink6URL=https://datasheet.ciiva.com/30206/11aba0000ce2-30206253.pdf, Contact Plating=Tin, Diameter=6.3mm, Height=5.4mm, Height - Seated (Max)=0.213inch, Lead Free="Lead Free", Length=5.5mm, Life (Hours)=1000Hour, Mount="Surface Mount,PCB", Packaging="Tape and Reel", Pricing 1="1=0.38, 10=0.263, 100=0.1579, 500=0.11846 (USD)", Radiation Hardening=No, REACH SVHC=Unknown, Ripple Current (AC)=70mA, Stock 1=2820, Supplier 1=Digi-Key, Termination=SMD/SMT, Voltage Rating (DC)=35V
C5 C7 C11 C13 C23 C24 C25 C26 C28 C33 C35: "0.10µF ±10% 50V Ceramic Capacitor X7R 0603 (1608 Metric)", Capacitance=0.1µF, Manufacturer 1="AVX Corporation", Manufacturer Part Number 1=06035C104KAT2A, Operating Temperature="-55°C ~ 125°C", Package / Case="0603 (1608 Metric)", Ratings=-, Supplier Part Number 1=478-5052-1-ND, Temperature Coefficient=X7R, Tolerance=±10%, Voltage=50V, ComponentLink1Description=http://datasheets.avx.com/X7RDielectric.pdf, ComponentLink1URL=http://datasheets.avx.com/X7RDielectric.pdf, Height - Seated (Max)=-, Lead Spacing=-, Lead Style=-, Mounting Type="Surface Mount, MLCC", Packaging="Cut Tape (CT)", Part Status=Active, Size / Dimension="0.063\" L x 0.032\" W (1.60mm x 0.81mm)", Supplier 1=Digi-Key, Thickness (Max)="0.035\" (0.90mm)"
C16 C17 C18: library part CMP-013-0033-1, "20pF ±5% 50V Ceramic Capacitor C0G, NP0 0603 (1608 Metric)", Manufacturer 1="Murata Electronics North America", Manufacturer Part Number 1=GRM1885C1H200JA01D, Operating Temperature="-55°C ~ 125°C", Package / Case="0603 (1608 Metric)", Ratings=-, Temperature Coefficient="C0G, NP0", Tolerance=5%, Voltage=50V, ComponentLink1Description=http://www.murata.com/~/media/webrenewal/support/library/catalog/products/capacitor/mlcc/c02e.ashx, ComponentLink1URL=http://www.murata.com/~/media/webrenewal/support/library/catalog/products/capacitor/mlcc/c02e.ashx, Design Item ID="CAP CER 20PF 50V ±5% C0G/NP0 0603", Height - Seated (Max)=-, Lead Spacing=-, Lead Style=-, Mounting Type="Surface Mount, MLCC", Packaging="Cut Tape (CT)", Part Status=Active, Size / Dimension="0.063\" L x 0.031\" W (1.60mm x 0.80mm)", Source="Schematic Diagrams.SchLib", Thickness (Max)="0.035\" (0.90mm)"
C19 C20 C21: library part CMP-001-00085-2, "2pF ±0.25pF 50V Ceramic Capacitor C0G, NP0 0603 (1608 Metric)", Capacitance=2pF, Case Code (Imperial)=0603, Case Code (Metric)=1608, Dielectric=C0G, Max Operating Temperature=125°C, Min Operating Temperature=-55°C, Package Quantity=4000, Ratings=AEC-Q200, Voltage Rating=50V, Case/Package=0603, Composition=Ceramic, Depth=0.8mm, Height=0.8mm, Length=1.6mm, Mount="Surface Mount", Packaging="Tape and Reel", Termination=SMD/SMT, Thickness=0.035inch, Voltage Rating (DC)=50V, Weight=7.1E-05oz, Width=0.031inch
C22: library part CMP-013-0003-1, "100µF 35V Aluminum Electrolytic Capacitors Radial, Can - SMD 2000 Hrs @ 85°C", Case/Package=Radial, Leakage Current=3uA, Manufacturer 1=Panasonic, Manufacturer Part Number 1=EEE-1VA101XP, Max Operating Temperature=85°C, Min Operating Temperature=-40°C, Package Quantity=900, Ripple Current=132mA, Tolerance=20%, Voltage=35V, ComponentLink1Description=https://datasheet.ciiva.com/46378/aba0000ce2-46378341.pdf, ComponentLink1URL=https://datasheet.ciiva.com/46378/aba0000ce2-46378341.pdf, ComponentLink2Description=https://datasheet.ciiva.com/17535/aba0000ce2-17535510.pdf, ComponentLink2URL=https://datasheet.ciiva.com/17535/aba0000ce2-17535510.pdf, ComponentLink3Description=https://datasheet.ciiva.com/30170/11aba0000ce2-30170103.pdf, ComponentLink3URL=https://datasheet.ciiva.com/30170/11aba0000ce2-30170103.pdf, ComponentLink4Description=https://datasheet.ciiva.com/31414/aba0000ce2-31414696.pdf, ComponentLink4URL=https://datasheet.ciiva.com/31414/aba0000ce2-31414696.pdf, ComponentLink5Description=https://datasheet.ciiva.com/24068/aba0000ce2-40801-24068089.pdf, ComponentLink5URL=https://datasheet.ciiva.com/24068/aba0000ce2-40801-24068089.pdf, ComponentLink6Description=https://datasheet.ciiva.com/14591/70255710-14591771.pdf, ComponentLink6URL=https://datasheet.ciiva.com/14591/70255710-14591771.pdf, ComponentLink7Description=https://datasheet.ciiva.com/14600/70255710-14600731.pdf, ComponentLink7URL=https://datasheet.ciiva.com/14600/70255710-14600731.pdf, ComponentLink8Description=https://datasheet.ciiva.com/46374/aba0000ce2-46374427.pdf, ComponentLink8URL=https://datasheet.ciiva.com/46374/aba0000ce2-46374427.pdf, ComponentLink9Description=https://datasheet.ciiva.com/11673/aba0000ce2-11673887.pdf, ComponentLink9URL=https://datasheet.ciiva.com/11673/aba0000ce2-11673887.pdf, Contact Plating=Tin, Description 1="Cap Aluminum Lytic 100uF 35V 20% (6.3 X 7.7mm) SMD 132mA 2000h 85C Automotive T/R", Design Item ID="CAP ALUM 100UF 20% 35V SMD", Diameter=6.3mm, Height=7.7mm, Height - Seated (Max)=0.303inch, Lead Free="Lead Free", Length=8mm, Life (Hours)=2000Hour, Mount="Surface Mount,PCB", Packaging="Tape and Reel", Pins=8, Polarity=Polar, Pricing 1="1=0.44, 10=0.304, 100=0.1822 (USD)", Radiation Hardening=No, REACH SVHC="No SVHC", Ripple Current (AC)=132mA, Source="Schematic Diagrams.SchLib", Stock 1=170823, Termination=SMD/SMT, Voltage Rating=35V, Voltage Rating (DC)=35V
D1 D2 D6: "TVS DIODE 15VWM 24.4VC SMB", Capacitance @ Frequency=-, Current - Peak Pulse (10/1000µs)=24.6A, Manufacturer 1="Fairchild/ON Semiconductor", Manufacturer Part Number 1=SMBJ15CA, Operating Temperature="-55°C ~ 150°C (TJ)", Package / Case="DO-214AA, SMB", Power - Peak Pulse=600W, Power Line Protection=No, Supplier Device Package="DO-214AA (SMB)", Supplier Part Number 1=SMBJ15CAFSCT-ND, Voltage - Breakdown (Min)=16.7V, Voltage - Clamping (Max) @ Ipp=24.4V, Voltage - Reverse Standoff (Typ)=15V, Applications="General Purpose", Category="Circuit Protection", ComponentLink1Description=https://www.fairchildsemi.com/datasheets/SM/SMBJ10CA.pdf, ComponentLink1URL=https://www.fairchildsemi.com/datasheets/SM/SMBJ10CA.pdf, Description 1="TVS DIODE 15VWM 24.4VC SMB", Mounting Type="Surface Mount", Packaging="Cut Tape (CT)", Part Status=Active, Pricing 1="1=0.54, 10=0.444, 100=0.3027, 500=0.22704, 1000=0.17028 (CAD)", RoHS="RoHS Compliant", Stock 1=24965, Supplier 1=Digi-Key, Type=Zener
D3 D4 D5: "Diode Schottky 30V 1A Surface Mount PowerDI™ 123", Capacitance @ Vr, F="76pF @ 10V, 1MHz", Current - Average Rectified (Io)=1A, Current - Reverse Leakage @ Vr="1mA @ 30V", Manufacturer="Diodes Incorporated", Manufacturer Part Number=DFLS130L-7, Operating Temperature - Junction="-40°C ~ 125°C", Package / Case=POWERDI®123, Supplier Device Package="PowerDI™ 123", Supplier Part Number 1=DFLS130LDICT-ND, Voltage - DC Reverse (Vr) (Max)=30V, Voltage - Forward (Vf) (Max) @ If="310mV @ 1A", Category="Discrete Semiconductor Products", ComponentLink1Description=https://www.diodes.com/assets/Datasheets/ds30492.pdf, ComponentLink1URL=https://www.diodes.com/assets/Datasheets/ds30492.pdf, Diode Type=Schottky, Mounting Type="Surface Mount", Packaging="Cut Tape (CT)", Part Status=Active, Pricing 1="1=0.7, 10=0.599, 100=0.447, 500=0.35126, 1000=0.27142 (CAD)", RoHS="RoHS Compliant", Speed="Fast Recovery =< 500ns, > 200mA (Io)", Stock 1=68200, Supplier 1=Digi-Key
"DCDC Signals": library part CMP-003-0105-1, "Micro-Fit 3.0 Vertical Header, 3.00mm Pitch, Dual Row, 4 Circuits, with PCB Polarizing Peg, Tin, Glow-Wire Capable, Black", Color=Black, Contact Resistance=10mR, Current Rating=-, Manufacturer="Molex, LLC", Manufacturer Part Number=430450427, Material Flammability Rating="UL94 V-0", Max Operating Temperature=105°C, Min Operating Temperature=-40°C, Package Quantity=2232, Applications="General Purpose, Medical, Military, Telecommunications", ComponentLink1Description=http://www.molex.com/webdocs/datasheets/pdf/en-us/0430450427_PCB_HEADERS.pdf, ComponentLink1URL=http://www.molex.com/webdocs/datasheets/pdf/en-us/0430450427_PCB_HEADERS.pdf, Connector Type=Header, Contact Finish - Mating=Tin, Contact Finish - Post=Tin, Contact Finish Thickness - Mating="60.0µin (1.52µm)", Contact Finish Thickness - Post=-, Contact Length - Mating=-, Contact Length - Post="0.125\" (3.18mm)", Contact Material=Brass, Contact Plating=Tin, Contact Shape=Square, Contact Type="Male Pin", Depth=8.77mm, Design Item ID="CONN 4POS MICRO-FIT 3mm", Fastening Type="Locking Ramp", Features="Board Guide", Housing Color=Black, Housing Material=Polymer, Ingress Protection=-, Insulation Color=Black, Insulation Height="0.390\" (9.91mm)", Insulation Material="Liquid Crystal Polymer (LCP), Glass Filled", Length=10.15mm, Mated Stacking Heights=-, Mount="Through Hole", Mounting Type="Through Hole", Number of Contacts=4, Number of Ports=1, Number of Positions=6, Number of Positions Loaded=All, Number of Rows=2, Number of Terminals=4, Operating Temperature=-, Orientation=Straight, Overall Contact Length=-, Packaging=Tray, Part Status=Active, Pitch=3mm, Pitch - Mating="0.118\" (3.00mm)", RoHS="RoHS Compliant", Row Spacing=0.118inch, Row Spacing - Mating="0.118\" (3.00mm)", Shrouding="Shrouded - 4 Wall", Source="Schematic Diagrams.SchLib", Style="Board to Cable/Wire", Termination=Solder, Voltage Rating=-
F1 F2 F3: library part CMP-005-00014-1, "Fuse Holder 20A 500VAC Pin Through Hole", Color=Black, Current Rating=20A, Flammability Rating="UL94 V-0", Max Operating Temperature=145°C, Min Operating Temperature=-50°C, Package Quantity=1, Voltage=500V, Approvals=UL, Body Material=Nylon, Contact Material=Brass,Tin, Contact Plating=Tin, Depth=6.73mm, Fuse Current=20A, Fuse Type=Automotive, Illumination Type=Illuminated, Lead Free="Lead Free", Length=16mm, Material=Brass,Tin,Nylon, Mount=PCB,Vertical, Number of Circuits=1, Number of Poles=1, Orientation=Vertical, REACH SVHC="No SVHC", Termination="PC Pin", Voltage Rating (AC)=500V
LED1: "Green 572nm LED Indication - Discrete 2V 0603 (1608 Metric)", Color=Green, Current - Test=20mA, Lens Color=Colorless, Manufacturer="Wurth Electronics Inc.", Manufacturer Part Number=150060VS75000, Millicandela Rating=40mcd, Package / Case="0603 (1608 Metric)", Supplier Device Package=0603, Supplier Part Number 1=732-4980-1-ND, Voltage - Forward (Vf) (Typ)=2V, Category=Optoelectronics, ComponentLink1Description=http://katalog.we-online.de/led/datasheet/150060VS75000.pdf, ComponentLink1URL=http://katalog.we-online.de/led/datasheet/150060VS75000.pdf, Features=-, Height (Max)=0.80mm, Lens Style/Size="Rectangle with Flat Top, 1.10mm x 0.70mm", Lens Transparency=Clear, Mounting Type="Surface Mount", Packaging="Cut Tape (CT)", Part Status=Active, Pricing 1="1=0.21, 100=0.1617, 500=0.13964 (CAD)", RoHS="RoHS Compliant", Size / Dimension="1.60mm L x 0.80mm W", Stock 1=9408, Supplier 1=Digi-Key, Viewing Angle=140°, Wavelength - Dominant=570nm, Wavelength - Peak=572nm
M1 M2 M3 M4: Manufacturer="Wurth Electronics", Manufacturer Part Number=9774050151R, Supplier Part Number 1=732-7095-1-ND, Length=0.252inch, Material=Steel, Outside Diameter=0.201inch, Plating=Tin, Pricing 1="1 = 1.09000, 10 = 1.03000, 50 = 0.91800, 100 = 0.84000 (USD)", REACH SVHC=Unknown, RoHS=Yes, Stock 1=24846, Supplier 1=Digi-Key, Threaded/Unthreaded=Threaded
P1: "50 Position Connector Plug, Outer Shroud Contacts Surface Mount Gold", Manufacturer 1="Amphenol FCI", Manufacturer Part Number 1=10132797-055100LF, Supplier Part Number 1=609-5226-1-ND, ComponentLink1Description=http://portal.fciconnect.com/Comergent//fci/drawing/10132797.pdf, ComponentLink1URL=http://portal.fciconnect.com/Comergent//fci/drawing/10132797.pdf, Connector Type="Plug, Outer Shroud Contacts", Contact Finish=Gold, Contact Finish Thickness="1µin (0.025µm)", Height Above Board="0.169\" (4.30mm)", Mated Stacking Heights=5mm, Mounting Type="Surface Mount", Number of Positions=50, Number of Rows=2, Packaging="Cut Tape (CT)", Part Status=Active, Pitch="0.020\" (0.50mm)", Series="BergStak Plug", Supplier 1=Digi-Key
Q1 Q2 Q3 Q4 Q5 Q6 Q7 Q8 Q9 Q10 Q11 Q12 Q13: "P-Channel 16V 2.5A (Ta) 650mW (Ta) Surface Mount X2-DFN2015-3", Current - Continuous Drain (Id) @ 25°C="80A (Tc)", Drain to Source Voltage (Vdss)=40V, Drive Voltage (Max Rds On,  Min Rds On)="4.5V, 10V", Input Capacitance (Ciss) (Max) @ Vds="4840pF @ 20V", Operating Temperature="-55°C ~ 175°C (TJ)", Package / Case=8-PowerTDFN, Power Dissipation (Max)="214W (Tj)", Supplier Device Package=FDWS9508L-F085OSCT-ND, ComponentLink1Description=https://www.onsemi.com/pub/Collateral/FDWS9508L-F085-D.PDF, ComponentLink1URL=https://www.onsemi.com/pub/Collateral/FDWS9508L-F085-D.PDF, FET Feature=-, FET Type=P-Channel, Gate Charge (Qg) (Max) @ Vgs="107nC @ 10V", Mounting Type="Surface Mount", Packaging="Cut Tape (CT)", Part Status=Active, Rds On (Max) @ Id, Vgs="4.9mOhm @ 80A, 10V", Supplier 1=Digi-Key, Supplier Part Number 1=FDWS9508L-F085OSCT-ND, Technology="MOSFET (Metal Oxide)", Vgs (Max)=±16V, Vgs(th) (Max) @ Id="3V @ 250µA"
Q14: library part CMP-003-0074-1, "N-Channel 30V 6.2A (Ta) 900mW (Ta) Surface Mount SOT-23", Case/Package=TO-236-3, Continuous Drain Current (ID)=6.2A, Drain to Source Voltage (Vdss)=30V, Input Capacitance=873pF, Manufacturer=Diodes, Manufacturer Part Number=DMN3023L-7, Max Operating Temperature=150°C, Max Power Dissipation=900mW, Min Operating Temperature=-55°C, ComponentLink1Description=https://www.diodes.com/assets/Datasheets/DMN3023L.pdf, ComponentLink1URL=https://www.diodes.com/assets/Datasheets/DMN3023L.pdf, ComponentLink2Description=http://www.mouser.com/ds/2/115/DMN3023L-959533.pdf, ComponentLink2URL=http://www.mouser.com/ds/2/115/DMN3023L-959533.pdf, Design Item ID="MOSFET N-CH 30V 6.2A 0.9W SOT-23", Mount="Surface Mount", Packaging="Tape and Reel", Pricing 1="1=0.47, 10=0.368, 100=0.2529, 500=0.1734, 1000=0.1301 (USD)", Rds On Max=25mR, Source="Schematic Diagrams.SchLib", Stock 1=38246
R1: "4.7k Ohm ±1% 0.1W, 1/10W Chip Resistor 0603 (1608 Metric) Moisture Resistant Thick Film", Manufacturer 1=Yageo, Manufacturer Part Number 1=RC0603FR-074K7L, Operating Temperature="-55°C ~ 155°C", Package / Case="0603 (1608 Metric)", Power (Watts)=1/10W, Resistance (Ohms)=4.7k, Supplier Device Package=0603, Supplier Part Number 1=311-4.70KHRCT-ND, Temperature Coefficient=±100ppm/°C, Tolerance=±1%, Category=Resistors, ComponentLink1Description=http://www.yageo.com/documents/recent/PYu-RC_Group_51_RoHS_L_7.pdf, ComponentLink1URL=http://www.yageo.com/documents/recent/PYu-RC_Group_51_RoHS_L_7.pdf, Composition="Thick Film", Description 1="RES SMD 4.7K OHM 1% 1/10W 0603", Failure Rate=-, Features="Moisture Resistant", Height - Seated (Max)="0.022\" (0.55mm)", Packaging="Cut Tape (CT)", Part Status=Active, Pricing 1="1=0.16, 10=0.022, 100=0.0089, 1000=0.00402, 2500=0.00349 (CAD)", RoHS="RoHS Compliant", Size / Dimension="0.063\" L x 0.031\" W (1.60mm x 0.80mm)", Stock 1=3487566, Supplier 1=Digi-Key
R2: "0.003 Ohm ±1% 1.5W Chip Resistor 2010 (5025 Metric) Current Sense, Moisture Resistant Metal Foil", Manufacturer 1="Stackpole Electronics Inc.", Manufacturer Part Number 1=CSNL2010FT3L00, Operating Temperature="-55°C ~ 170°C", Package / Case="2010 (5025 Metric)", Power (Watts)=1.5W, Resistance (Ohms)=0.003R, Supplier Device Package=2010, Supplier Part Number 1=CSNL2010FT3L00CT-ND, Temperature Coefficient=±50ppm/°C, Tolerance=±1%, Category=Resistors, ComponentLink1Description=https://www.seielect.com/Catalog/SEI-csnl.pdf, ComponentLink1URL=https://www.seielect.com/Catalog/SEI-csnl.pdf, Composition="Metal Foil", Description 1="RES SMD 0.003 OHM 1% 1.5W 2010", Failure Rate=-, Features="Current Sense, Moisture Resistant", Height - Seated (Max)="0.041\" (1.04mm)", Packaging="Cut Tape (CT)", Part Status=Active, Pricing 1="1=1.02, 10=0.844, 25=0.7232, 50=0.6508, 100=0.5665, 250=0.5062, 500=0.4098, 1000=0.33145 (CAD)", RoHS="RoHS Compliant", Size / Dimension="0.200\" L x 0.100\" W (5.08mm x 2.54mm)", Stock 1=18532, Supplier 1=Digi-Key
R3 R5 R9 R11 R36 R38: "100 Ohm ±1% 0.1W, 1/10W Chip Resistor 0603 (1608 Metric) Moisture Resistant Thick Film", Manufacturer 1=Yageo, Manufacturer Part Number 1=RC0603FR-07100RL, Operating Temperature="-55°C ~ 155°C", Package / Case="0603 (1608 Metric)", Power=1/10W, Resistance=100, Supplier Device Package=0603, Supplier Part Number 1=311-100HRCT-ND, Temperature Coefficient=±100ppm/°C, Tolerance=±1%, ComponentLink1Description=http://www.yageo.com/documents/recent/PYu-RC_Group_51_RoHS_L_7.pdf, ComponentLink1URL=http://www.yageo.com/documents/recent/PYu-RC_Group_51_RoHS_L_7.pdf, Composition="Thick Film", Failure Rate=-, Height - Seated (Max)="0.022\" (0.55mm)", Packaging="Cut Tape (CT)", Part Status=Active, Size / Dimension="0.063\" L x 0.031\" W (1.60mm x 0.80mm)", Supplier 1=Digi-Key
R4: "RES SMD 470K OHM 1% 1/4W 0603", Manufacturer 1="Panasonic Electronic Components", Manufacturer Part Number 1=ERJ-PA3F4703V, Operating Temperature="-55°C ~ 155°C", Package / Case="0603 (1608 Metric)", Power=1/4W, Resistance=470k, Supplier Device Package=0603, Supplier Part Number 1=P470KBYCT-ND, Temperature Coefficient=±100ppm/°C, Tolerance=±1%, ComponentLink1Description=https://industrial.panasonic.com/cdbs/www-data/pdf/RDO0000/AOA0000C291.pdf, ComponentLink1URL=https://industrial.panasonic.com/cdbs/www-data/pdf/RDO0000/AOA0000C291.pdf, Composition="Thick Film", Failure Rate=-, Height - Seated (Max)="0.022\" (0.55mm)", Packaging="Cut Tape (CT)", Part Status=Active, Size / Dimension="0.063\" L x 0.031\" W (1.60mm x 0.80mm)", Supplier 1=Digi-Key
R6 R12 R39: "RES SMD 100K OHM 5% 1/10W 0603", Manufacturer 1=Yageo, Manufacturer Part Number 1=RC0603JR-07100KL, Operating Temperature="-55°C ~ 155°C", Package / Case="0603 (1608 Metric)", Power=1/10W, Resistance=100k, Supplier Device Package=0603, Supplier Part Number 1=311-100KGRCT-ND, Temperature Coefficient=±100ppm/°C, Tolerance=±5%, ComponentLink1Description=http://www.yageo.com/documents/recent/PYu-RC_Group_51_RoHS_L_7.pdf, ComponentLink1URL=http://www.yageo.com/documents/recent/PYu-RC_Group_51_RoHS_L_7.pdf, Composition="Thick Film", Failure Rate=-, Height - Seated (Max)="0.022\" (0.55mm)", Packaging="Cut Tape (CT)", Part Status=Active, Size / Dimension="0.063\" L x 0.031\" W (1.60mm x 0.80mm)", Supplier 1=Digi-Key
R7 R13 R17 R30 R31 R32 R33 R35 R40: "RES SMD 10K OHM 1% 1/10W 0603", Manufacturer 1=Yageo, Manufacturer Part Number 1=RC0603FR-0710KL, Operating Temperature="-55°C ~ 155°C", Package / Case="0603 (1608 Metric)", Power=1/10W, Resistance=10k, Supplier Device Package=0603, Supplier Part Number 1=311-10.0KHRCT-ND, Temperature Coefficient=±100ppm/°C, Tolerance=±1%, ComponentLink1Description=http://www.yageo.com/documents/recent/PYu-RC_Group_51_RoHS_L_7.pdf, ComponentLink1URL=http://www.yageo.com/documents/recent/PYu-RC_Group_51_RoHS_L_7.pdf, Composition="Thick Film", Failure Rate=-, Height - Seated (Max)="0.022\" (0.55mm)", Packaging="Cut Tape (CT)", Part Status=Active, Size / Dimension="0.063\" L x 0.031\" W (1.60mm x 0.80mm)", Supplier 1=Digi-Key
R8 R34: "4 mOhms ±1% 2W Chip Resistor 2010 (5025 Metric) Automotive AEC-Q200, Current Sense Metal Element", Power (Watts)=2W, Resistance=4mR, Supplier Part Number 1=2019-TLR2HWDTE4L00F75CT-ND, Supplier 1=Digi-Key
R10 R37: "RES SMD 470K OHM 1% 1/4W 0603", Manufacturer 1="Panasonic Electronic Components", Manufacturer Part Number 1=ERJ-PA3F4703V, Operating Temperature="-55°C ~ 155°C", Package / Case="0603 (1608 Metric)", Resistance=470k, Supplier Device Package=0603, Supplier Part Number 1=P470KBYCT-ND, Temperature Coefficient=±100ppm/°C, Tolerance=±1%, ComponentLink1Description=https://industrial.panasonic.com/cdbs/www-data/pdf/RDO0000/AOA0000C291.pdf, ComponentLink1URL=https://industrial.panasonic.com/cdbs/www-data/pdf/RDO0000/AOA0000C291.pdf, Composition="Thick Film", Failure Rate=-, Height - Seated (Max)="0.022\" (0.55mm)", Packaging="Cut Tape (CT)", Part Status=Active, Size / Dimension="0.063\" L x 0.031\" W (1.60mm x 0.80mm)", Supplier 1=Digi-Key
R14 R15 R16: library part "RES 2.21K OHM 1% 1/10W 0603", "2.21 kOhms ±1% 0.1W, 1/10W Chip Resistor 0603 (1608 Metric) Automotive AEC-Q200, Moisture Resistant Thick Film", Case/Package=0603, Case Code (Metric)=1608, Manufacturer=Yageo, Manufacturer Part Number=AC0603FR-072K21L, Max Operating Temperature=155°C, Max Power Dissipation=100mW, Min Operating Temperature=-55°C, Resistance=2.21kR, Supplier Part Number 1=YAG3586CT-ND, Temperature Coefficient=100ppm/°C, Tolerance=1%, Voltage Rating=50V, Working Voltage=75V, Case Code (Imperial)=0603, ComponentLink1Description=https://datasheet.ciiva.com/12576/pyu-ac-51-rohs-l-2-12576458.pdf, ComponentLink1URL=https://datasheet.ciiva.com/12576/pyu-ac-51-rohs-l-2-12576458.pdf, Composition="Thick Film", Height=0.022inch, Lead Free="Lead Free", Length=0.063inch, Number of Terminations=2, Packaging="Tape and Reel", Power Rating=100mW, Pricing 1="1=0.1, 10=0.029, 100=0.0117, 1000=0.00527, 2500=0.00458 (USD)", Stock 1=11020, Supplier 1=Digi-Key, Termination=SMD/SMT, Weight=7.1E-05oz, Width=0.8mm
R18 R19: "RES SMD 10K OHM 1% 1/10W 0603", Manufacturer 1=Yageo, Manufacturer Part Number 1=RC0603FR-0710KL, Operating Temperature="-55°C ~ 155°C", Package / Case="0603 (1608 Metric)", Resistance=10k, Supplier Device Package=0603, Supplier Part Number 1=311-10.0KHRCT-ND, Temperature Coefficient=±100ppm/°C, Tolerance=±1%, ComponentLink1Description=http://www.yageo.com/documents/recent/PYu-RC_Group_51_RoHS_L_7.pdf, ComponentLink1URL=http://www.yageo.com/documents/recent/PYu-RC_Group_51_RoHS_L_7.pdf, Composition="Thick Film", Failure Rate=-, Height - Seated (Max)="0.022\" (0.55mm)", Packaging="Cut Tape (CT)", Part Status=Active, Size / Dimension="0.063\" L x 0.031\" W (1.60mm x 0.80mm)", Supplier 1=Digi-Key
R20 R21 R23 R42: "1M Ohm ±1% 0.1W, 1/10W Chip Resistor 0603 (1608 Metric) Moisture Resistant Thick Film", Manufacturer 1=Yageo, Manufacturer Part Number 1=RC0603FR-071ML, Operating Temperature="-55°C ~ 155°C", Package / Case="0603 (1608 Metric)", Resistance (Ohms)=1M, Supplier Device Package=0603, Supplier Part Number 1=311-1.00MHRCT-ND, Temperature Coefficient=±100ppm/°C, Tolerance=±1%, Category=Resistors, ComponentLink1Description=http://www.yageo.com/documents/recent/PYu-RC_Group_51_RoHS_L_7.pdf, ComponentLink1URL=http://www.yageo.com/documents/recent/PYu-RC_Group_51_RoHS_L_7.pdf, Composition="Thick Film", Description 1="RES SMD 1M OHM 1% 1/10W 0603", Failure Rate=-, Features="Moisture Resistant", Height - Seated (Max)="0.022\" (0.55mm)", Packaging="Cut Tape (CT)", Part Status=Active, Pricing 1="1=0.16, 10=0.022, 100=0.0089, 1000=0.00402, 2500=0.00349 (CAD)", RoHS="RoHS Compliant", Size / Dimension="0.063\" L x 0.031\" W (1.60mm x 0.80mm)", Stock 1=2336711, Supplier 1=Digi-Key
R22: "19.6 kOhms ±1% 0.1W, 1/10W Chip Resistor 0603 (1608 Metric) Automotive AEC-Q200 Thick Film", Power (Watts)=1/10W, Resistance="19.6 k", Supplier Part Number 1=RMCF0603FT19K6CT-ND, ComponentLink1Description=https://www.seielect.com/catalog/sei-rmcf_rmcp.pdf, ComponentLink1URL=https://www.seielect.com/catalog/sei-rmcf_rmcp.pdf, Supplier 1=Digi-Key
R24: "255k Ohm ±1% 0.1W, 1/10W Chip Resistor 0603 (1608 Metric) Moisture Resistant Thick Film", Manufacturer 1=Yageo, Manufacturer Part Number 1=RC0603FR-07255KL, Operating Temperature="-55°C ~ 155°C", Package / Case="0603 (1608 Metric)", Power (Watts)=1/10W, Resistance (Ohms)=255k, Supplier Device Package=0603, Supplier Part Number 1=311-255KHRCT-ND, Temperature Coefficient=±100ppm/°C, Tolerance=±1%, Category=Resistors, ComponentLink1Description=http://www.yageo.com/documents/recent/PYu-RC_Group_51_RoHS_L_7.pdf, ComponentLink1URL=http://www.yageo.com/documents/recent/PYu-RC_Group_51_RoHS_L_7.pdf, Composition="Thick Film", Description 1="RES SMD 255K OHM 1% 1/10W 0603", Failure Rate=-, Features="Moisture Resistant", Height - Seated (Max)="0.022\" (0.55mm)", Packaging="Cut Tape (CT)", Part Status=Active, Pricing 1="1=0.16, 10=0.022, 100=0.0089, 1000=0.00402, 2500=0.00349 (CAD)", RoHS="RoHS Compliant", Size / Dimension="0.063\" L x 0.031\" W (1.60mm x 0.80mm)", Stock 1=106564, Supplier 1=Digi-Key
R25 R29: "75 kOhms ±0.1% 0.1W, 1/10W Chip Resistor 0603 (1608 Metric) Automotive AEC-Q200 Thin Film", Manufacturer="Panasonic Electronic Components", Manufacturer Part Number=AC0603FR-0775RL, Operating Temperature="-55°C ~ 155°C", Package / Case="0603 (1608 Metric)", Power (Watts)="0.1W, 1/10W", Supplier Device Package=0603, Supplier Part Number 1=P75KDBCT-ND, Temperature Coefficient=±25ppm/°C, Tolerance=±0.1%, Category=Resistors, ComponentLink1Description=http://www.yageo.com/NewPortal/yageodocoutput?fileName=/pdf/R-Chip/PYu-AC_51_RoHS_L_6.pdf, ComponentLink1URL=http://www.yageo.com/NewPortal/yageodocoutput?fileName=/pdf/R-Chip/PYu-AC_51_RoHS_L_6.pdf, Composition="Thin Film", Failure Rate=-, Features="Automotive AEC-Q200", Height - Seated (Max)="0.022\" (0.55mm)", Packaging="Cut Tape (CT)", Part Status=Active, RoHS="RoHS Compliant", Size / Dimension="0.063\" L x 0.031\" W (1.60mm x 0.80mm)", Supplier 1=Digi-Key
R26: "29.4k Ohm ±1% 0.1W, 1/10W Chip Resistor 0603 (1608 Metric) Moisture Resistant Thick Film", Manufacturer 1=Yageo, Manufacturer Part Number 1=RC0603FR-0729K4L, Operating Temperature="-55°C ~ 155°C", Package / Case="0603 (1608 Metric)", Power (Watts)=1/10W, Resistance (Ohms)=29.4k, Supplier Device Package=0603, Supplier Part Number 1=311-29.4KHRCT-ND, Temperature Coefficient=±100ppm/°C, Tolerance=±1%, Category=Resistors, ComponentLink1Description=http://www.yageo.com/documents/recent/PYu-RC_Group_51_RoHS_L_7.pdf, ComponentLink1URL=http://www.yageo.com/documents/recent/PYu-RC_Group_51_RoHS_L_7.pdf, Composition="Thick Film", Description 1="RES SMD 29.4K OHM 1% 1/10W 0603", Failure Rate=-, Features="Moisture Resistant", Height - Seated (Max)="0.022\" (0.55mm)", Packaging="Cut Tape (CT)", Part Status=Active, Pricing 1="1=0.16, 10=0.022, 100=0.0089, 1000=0.00402, 2500=0.00349 (CAD)", RoHS="RoHS Compliant", Size / Dimension="0.063\" L x 0.031\" W (1.60mm x 0.80mm)", Stock 1=76118, Supplier 1=Digi-Key